# Altium PCB Load_Cell_Amplifier.PcbDoc
Units mil, origin at the board's own origin, x right, y up, seen from the top; angles counter-clockwise.
Board outline 2585 x 1355 mil, 2 copper layers (Top Layer, Bottom Layer); 30 components, 26 nets, 142 pads, 30 vias.
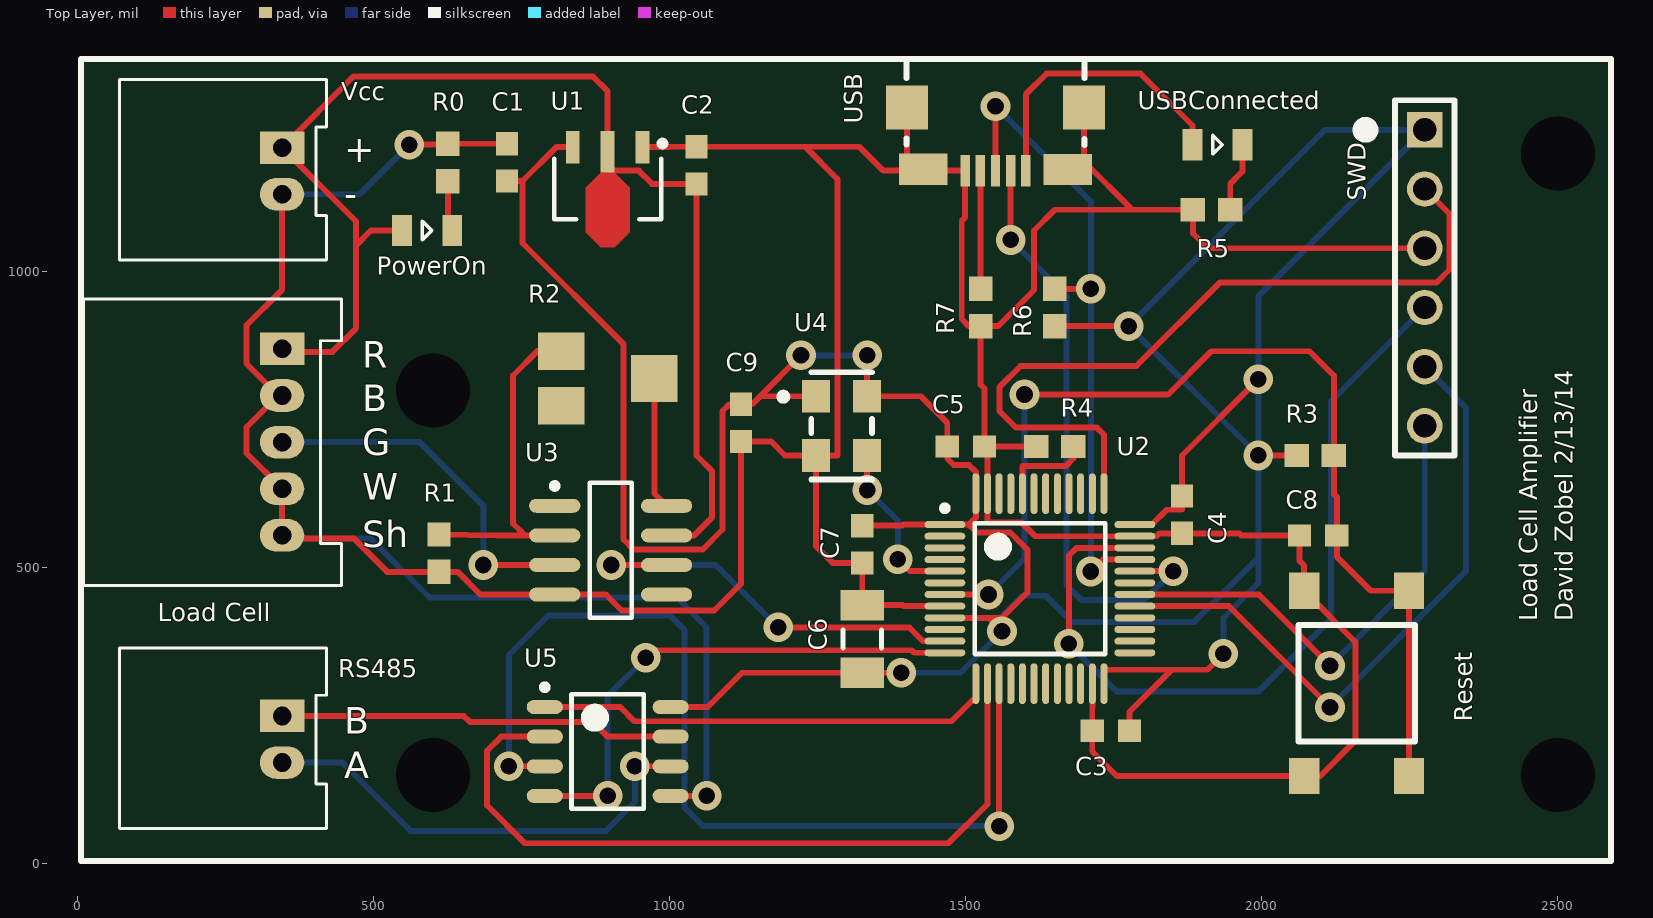
[diagram p0: Top Layer view]
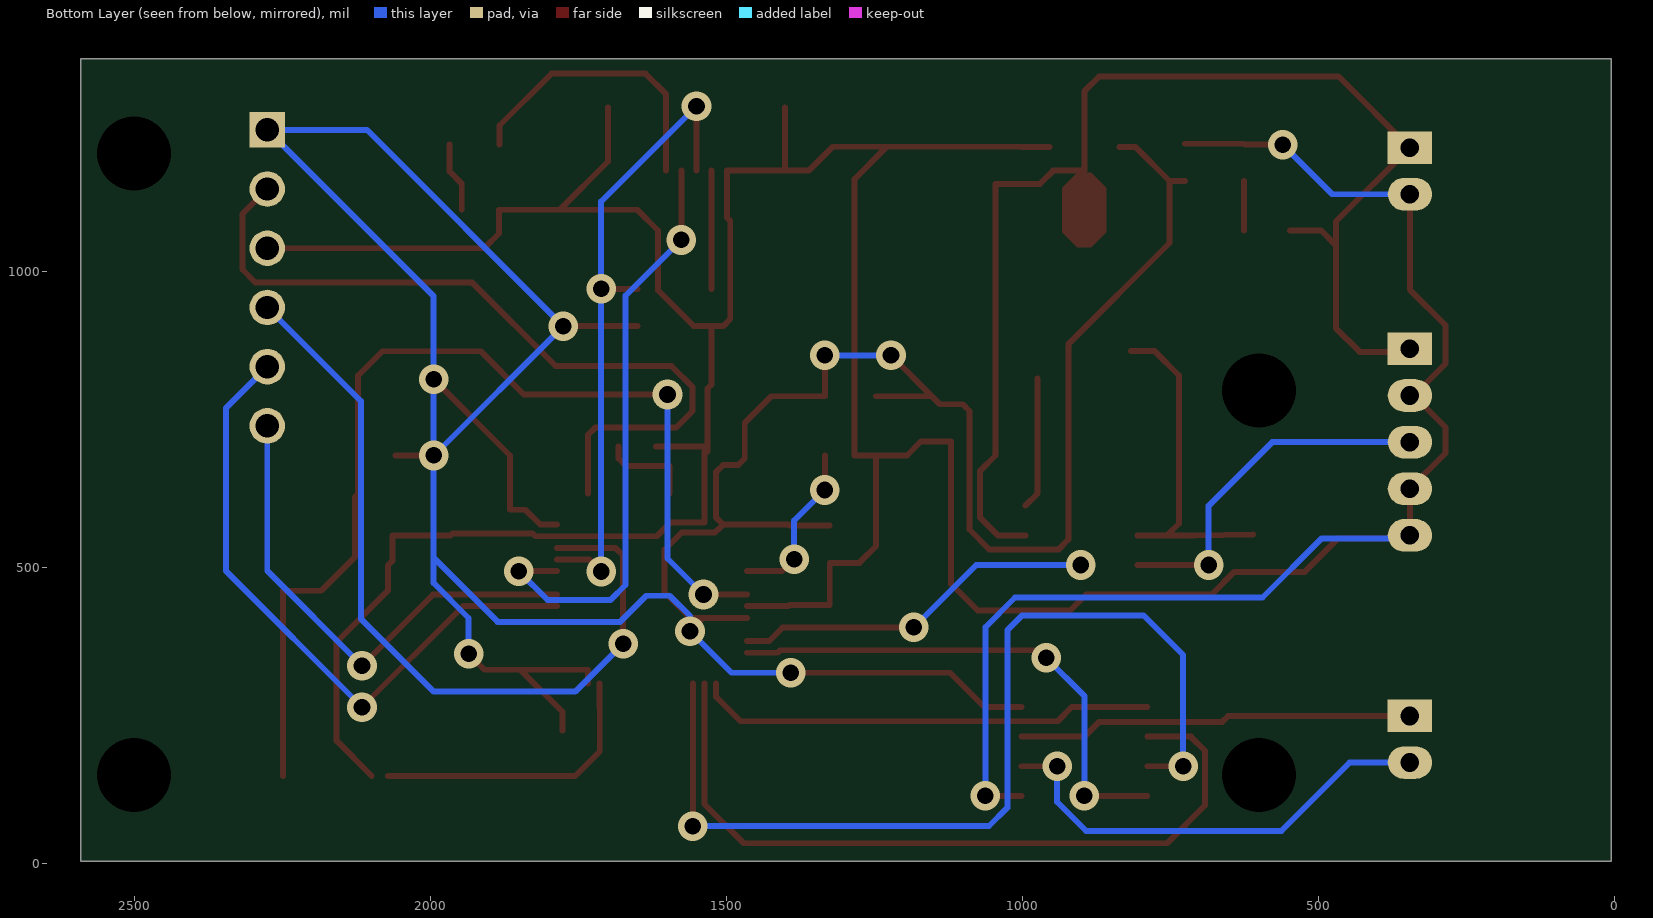
[diagram p1: Bottom Layer view, seen from below]

## Layer stack, top to bottom
Top Layer: signal copper 1.4
Dielectric: dielectric 12.6, FR-4, Dk 4.8
Bottom Layer: signal copper 1.4

## Board outline
5,5 5,1360 2590,1360 2590,5

## Design rules (kind name [scope] priority, off if disabled: settings)
Clearance [All] p1: gap=7
DiffPairsRouting [All] p1: maxlimit=10 minlimit=10 mostfreqgap=10 maxuncoupledlength=500
PolygonConnect [All] p1: connectstyle=Relief reliefconductorwidth=10 reliefentries=4 polygonreliefangle="90 Angle" airgapwidth=10
RoutingVias [All] p1: holewidth=28 width=50 viastyle="Through Hole" minholewidth=28 minwidth=50 maxholewidth=28 maxwidth=50
SolderMaskExpansion [All] p1: expansion=4
Width [All] p1: maxlimit=10 minlimit=10 preferedwidth=10
27 further rules are at their usual default settings.

## Classes and differential pairs
differential pair USB: +USB_P -USB_N

## Components (designator, comment, footprint, x,y, rotation, side; value= is the part's Value field where it differs from the comment)
C1 "Cap" CAPC0603 725,1185 r90 top
C2 "Cap" CAPC0603 1045,1180 r90 top
C3 "Cap" CAPC0603 1745,225 r180 top
C4 "Cap" CAPC0603 1865,590 r270 top
C5 "Cap" CAPC0603 1500,705 r0 top
C6 "Cap" CAPC1206 1325,380 r270 top
C7 "Cap" CAPC0603 1325,540 r270 top
C8 "Cap" CAPC0603 2095,555 r180 top
C9 "Cap" CAPC0603 1120,745 r270 top
"Load Cell" "MOLEX-HDR-1x5-SHERLOCK_RA" "MOLEX-HDR-1X5-SHERLOCK- RA" 345,870 r90 top
PowerOn "LED" LED0805 590,1070 r0 top
R0 "Res" RES0603 625,1185 r270 top
R1 "Res" RES0603 610,525 r90 top
R2 "Pot" ST4ETA103 895,820 r270 top
R3 "Res" RES0603 2090,690 r0 top
R4 "Res" RES0603 1650,705 r180 top
R5 "Res" RES0603 1915,1105 r0 top
R6 "Res" RES0603 1650,940 r90 top
R7 "Res" RES0603 1525,940 r270 top
Reset "Button" PTS645xxxxSMTR92 2160,305 r90 top (schematic designator S1)
RS485 "2-pin Horz Sherlock" MOLEX-HDR-1X2-SHERLOCK-HORZ 345,250 r90 top
SWD "SWD" SWD_STM32 2275,1240 r0 top
U1 "MCP1703AT" MCP1703AT-xx02EMB 895,1140 r270 top
U2 "STM32F072CB" STM32F072CB 1625,465 r0 top
U3 "INA145" INA145 900,530 r0 top
U4 "636L3C008M" 636L3C 1290,740 r270 top
U5 "SP3485" SP3485 895,190 r0 top
USB "USB Micro" 10118192-0001LF 1550,1150 r180 top
USBConnected "LED" LED0805 1925,1215 r0 top
Vcc "2-pin Horz Sherlock" MOLEX-HDR-1X2-SHERLOCK-HORZ 345,1210 r90 top

## Footprints (in the part's own frame and the unit in brackets; to place one, negate y for a bottom-side part, rotate by r counter-clockwise, add the part's x,y. Pads: shape width x height; smd on the part's side, far side on the other; paste and mask are expansions set on the pad)
636L3C [mm]
  rect 1.4x1.2 smd: 1(-1.27,-1.1) 2(1.27,-1.1) 3(1.27,1.1) 4(-1.27,1.1)
  silkscreen extent -2.3,-2.65 2.3,1.3, body extent -2.5,-1.6 2.5,1.6, height 2
10118192-0001LF [mm] "USB Micro-B Recepticle"
  rect 0.4x1.35 smd: 1(-1.3,-0.533) 2(-0.65,-0.533) 3(0,-0.533) 4(0.65,-0.533) 5(1.3,-0.533)
  rect 1.8x1.9 smd: SHD(-3.8,-3.248) SHD(3.8,-3.248)
  rect 2.1x1.35 smd: SHD(-3.1,-0.584) SHD(3.1,-0.598)
  silkscreen extent -3.82,-5.33 3.82,-1.63, body extent -3.96,-5.98 3.96,-0.32, height 3.09
CAPC0603 [mm] "Chip Capacitor, 2-Leads, Body 1.60x0.80mm, IPC Medium Density"
  rect 1x0.95 smd: 1(-0.8,0) 2(0.8,0)
  body extent -0.88,-0.48 0.87,0.48, height 0.8
CAPC1206 [mm] "Chip Capacitor, 2-Leads, Body 3.20x1.60mm, IPC Medium Density"
  rect 1.3x1.85 smd: 1(-1.45,0) 2(1.45,0)
  silkscreen extent -0.4,-0.82 0.4,0.82, body extent -1.7,-0.9 1.7,0.9, height 1.8
INA145 [mm] "SOIC, 8-Leads, Body 5.30x3.90mm, Pitch 1.27mm, IPC Medium Density"
  oval 2.2x0.6 smd: 1(-2.4,1.905) 2(-2.4,0.635) 3(-2.4,-0.635) 4(-2.4,-1.905) 5(2.4,-1.905) 6(2.4,-0.635) 7(2.4,0.635) 8(2.4,1.905)
  silkscreen extent -2.52,-2.9 0.9,2.9, body extent -2,-2.9 2,2.9, height 1.75
LED0805 [mm] "Chip LED, 2-Leads, Body 2.00x1.25mm, IPC Medium Density"
  rect 0.85x1.35 smd: A(-1.075,0) C(1.075,0)
  silkscreen extent -0.2,-0.4 0.2,0.4, body extent -1,-0.63 1,0.63, height 0.75
MCP1703AT-xx02EMB [mm] "SOT89, 3-Leads, Body 4.49x2.45mm, Pitch 1.50mm, Lead Span 4.1mm, IPC Medium Density"
  rect 1.4x0.6 smd: 1(-1.8,1.5) 3(-1.8,-1.5)
  rect 1.8x0.6 smd: 2(-1.6,0)
  Top Layer region: -0.7,0.3 -0.05,0.95 1.85,0.95 2.5,0.3 2.5,-0.3 1.85,-0.95 -0.05,-0.95 -0.7,-0.3
  silkscreen extent -2.08,-2.3 1.3,2.48, body extent -1.3,-2.3 1.3,2.3, height 1.6
MOLEX-HDR-1X2-SHERLOCK-HORZ [mm]
  rect 1.397x1.905 hole 0.8: 1(0,0)
  oval 1.397x1.905 hole 0.8: 2(-2,0)
  silkscreen extent -4.83,-1.91 2.92,6.98, body extent -4.83,-1.91 2.87,8.59, height 5.54
"MOLEX-HDR-1X5-SHERLOCK- RA" [mm]
  rect 1.397x1.905 hole 0.8: 1(0,0)
  oval 1.397x1.905 hole 0.8: 2(-2,0) 3(-4,0) 4(-6,0) 5(-8,0)
  silkscreen extent -10.16,-2.55 2.15,8.51, body extent -10.16,-1.96 2.14,8.54, height 5.54
PTS645xxxxSMTR92 [mm] "PTS645 Series SMT 6 mm Tactile Switch"
  rect 1.555x1.3 smd: A(-3.975,2.25) A(3.975,2.25) B(-3.975,-2.25) B(3.975,-2.25)
  silkscreen extent -2.5,-2.5 2.5,2.5, body extent -3,-3 3,3, height 4.5
RES0603 [mm] "Chip Resistor, 2-Leads, Body 1.60x0.80mm, IPC Medium Density"
  rect 1.05x1 smd: 1(-0.8,0) 2(0.8,0)
  body extent -0.88,-0.48 0.87,0.47, height 0.8
SP3485 [mm] "SOIC, 8-Leads, Body 4.90x3.90mm, Pitch 1.27mm, IPC Medium Density"
  oval 1.55x0.6 smd: 1(-2.7,1.905) 2(-2.7,0.635) 3(-2.7,-0.635) 4(-2.7,-1.905) 5(2.7,-1.905) 6(2.7,-0.635) 7(2.7,0.635) 8(2.7,1.905)
  silkscreen extent -2.82,-2.45 1.55,2.88, body extent -1.95,-2.45 1.95,2.45, height 1.75
ST4ETA103 [mm] "TRIMMER 10K OHM 0.25W SMD"
  rect 1.6x2 smd: 1(-1.175,-2) 2(1.175,-2)
  rect 2x2 smd: 3(0,2)
  body extent -2.5,-2.3 2.5,2.3, height 2.3
STM32F072CB [mm] "TSQFP, 48-Leads, Body 7.00x7.00mm, Pitch 0.50mm, IPC Medium Density"
  oval 1.75x0.3 smd: 1(-4.075,2.75) 2(-4.075,2.25) 3(-4.075,1.75) 4(-4.075,1.25) 5(-4.075,0.75) 6(-4.075,0.25) 7(-4.075,-0.25) 8(-4.075,-0.75) 9(-4.075,-1.25) 10(-4.075,-1.75) 11(-4.075,-2.25) 12(-4.075,-2.75) 25(4.075,-2.75) 26(4.075,-2.25) 27(4.075,-1.75) 28(4.075,-1.25) 29(4.075,-0.75) 30(4.075,-0.25) 31(4.075,0.25) 32(4.075,0.75) 33(4.075,1.25) 34(4.075,1.75) 35(4.075,2.25) 36(4.075,2.75)
  oval 0.3x1.75 smd: 13(-2.75,-4.075) 14(-2.25,-4.075) 15(-1.75,-4.075) 16(-1.25,-4.075) 17(-0.75,-4.075) 18(-0.25,-4.075) 19(0.25,-4.075) 20(0.75,-4.075) 21(1.25,-4.075) 22(1.75,-4.075) 23(2.25,-4.075) 24(2.75,-4.075) 37(2.75,4.075) 38(2.25,4.075) 39(1.75,4.075) 40(1.25,4.075) 41(0.75,4.075) 42(0.25,4.075) 43(-0.25,4.075) 44(-0.75,4.075) 45(-1.25,4.075) 46(-1.75,4.075) 47(-2.25,4.075) 48(-2.75,4.075)
  silkscreen extent -4.2,-2.8 2.8,3.57, body extent -3.5,-3.5 3.5,3.5, height 1.6
SWD_STM32 [mil] "SWD connector matching the pinout on STM Discovery Boards"
  rect 60x60 hole 39.37: 1(0,0)
  round 60 hole 39.37: 2(0,-100) 3(0,-200) 4(0,-300) 5(0,-400) 6(0,-500)
  silkscreen extent -110,-550 50,50

## Part data
"Load Cell": "Header, Molex, 2mm Pitch Sherlock Header, Single Row, Vertical, 5 Circuits, Length 3.3mm, 0353620550"
R2: library part Potentiometer, "Potentiometer"
Reset: "SPST Button"
RS485 Vcc: library part MOLEX-HDR-1x2-SHERLOCK_RA, "Header, Molex, 2mm Pitch Sherlock Header, Single Row, Horizontal, 2 Circuits, Length 3.3mm,  0353630260"
SWD: library part SWD_STM32, "SWD connector matching the pinout on STM Discovery Boards"
U1: "250 mA, 16V, Low Quiescent Current LDO Regulator"
U2: "MCU 32BIT 128KB FLASH 48LQFP"
U3: "Diff Amp"
U4: library part 636L3C, "HCMOS/TTL Clock Oscillator"
U5: "IC TXRX RS485 HALF DUPLEX 8NSOIC"
USB: "USB Mini B Metal Shield SMT"

## Free pads (board coordinates)
  round 100 hole 125 unplated: 0(600,150) 0(600,800) 0(2500,150) 0(2500,1200)

## Via types
v1: diameter 50, hole 28, Top Layer to Bottom Layer, tented both sides, 30 vias

## Nets (pads, with @x,y where several pads share a name; then routed paths per layer and width w, separated by ;. In a path a pad name is that pad's centre, name@x,y a point inside that pad or via, vN(x,y) a via of type N, cw(c..) or ccw(c..) an arc to the next point about the centre after c; other vN are vias at no path point)
3V3: C1.1 C3.1 C4.1 C5.1 C6.2 C7.1 C9.1 R3.1 R6.1 SWD.1 U1.3 U2.1 U2.9 U2.24 U2.36 U2.48 U4.1 U4.4 U5.8 | length 6613.4
  Top Layer w10: C1.1 751,1153.5 ; U1.3 808.36,1210.87 751,1153.5 ; U5.8 1064,265 1121.91,322.91 C6.2 v1(1390.91,322.91) ; v1(1221.5,859) 1152.5,790 ; U4.1 1152.5,790 ; C7.1 1393,571.5 1394.77,573.27 U2.1 1505,573.27 ; v1(1333.31,859) U4.4 1423.5,790 1468.5,745 C5.1 1468.5,685 1479.5,674 1505,674 1516.73,662.27 U2.48 1516.73,585 1505,573.27 ; U2.9 1538.21,415.79 ; v1(1561,393) 1538.21,415.79 ; R6.1 v1(1775,908.5) ; U2.24 1733.27,328 1847.5,328 ; C3.1 1776.5,257 1847.5,328 ; U2.36 1814,573.27 1839,598.27 1865,598.27 C4.1 1865,690 v1(1994,819) ; v1(1935,355) 1908,328 1847.5,328 ; v1(1993.5,690) R3.1 ; 751,1153.5 751,1049 922,878 922,548 939,531 1055,531 1089,565 1089,765 1100.5,776.5 C9.1 1139,776.5 1152.5,790 ; 1505,573.27 1519,560 1575,560 1604,531 1604,458.79 1561,415.79 1538.21,415.79
  Bottom Layer w10: v1(1221.5,859) v1(1333.31,859) ; v1(1390.91,322.91) 1490.91,322.91 v1(1561,393) 1561,419 1595,453 1635,453 1679,409 1886,409 1994,517 ; v1(1935,355) 1935,415.5 1994,474.5 1994,517 ; v1(1993.5,690) v1(1775,908.5) 2106.5,1240 SWD.1 1994,959 v1(1994,819) 1994,517
/RE: U2.14 U5.2 | length 1302.5
  Top Layer w10: U5.2 715,215 691,191 691,99 755,35 1470.42,35 1536.42,101 U2.14
CLK8MHZ: U2.5 U4.3 | length 284.5
  Top Layer w10: v1(1333.31,631.69) U4.3 ; v1(1385,515) 1405.47,494.53 U2.5
  Bottom Layer w10: v1(1333.31,631.69) 1385,580 v1(1385,515)
DE: U2.15 U5.3 | length 1668.3
  Top Layer w10: v1(728,165) U5.3 ; v1(1556.1,64) U2.15
  Bottom Layer w10: v1(728,165) 728,353 795,420 1000,420 1025,395 1025,95 1056,64 v1(1556.1,64)
GND: "Load Cell.2" "Load Cell.4" "Load Cell.5" C1.2 C2.2 C3.2 C4.2 C5.2 C6.1 C7.2 C8.2 C9.2 R0.1 R1.1 R4.2 R5.1 R7.2 Reset.A SWD.3 U1.1 U2.8 U2.23 U2.35 U2.47 U3.4 U4.2 U5.5 USB.5 USB.SHD Vcc.2 | length 8502.5
  Top Layer w10: 330,785.32 332.8,785.32 ; 345,550.04 466,550.04 522.54,493.5 R1.1 641.5,493.5 680,455 U3.4 892,455 919,428 1075,428 1120,473 C9.2 1171,713.5 1194.5,690 U4.2 ; 345,555.04 345,633.78 285,693.78 285,737.52 332.8,785.32 ; Vcc.2 345,970 285,910 285,845 338.74,791.26 332.8,785.32 ; 370.32,785.32 332.8,785.32 ; v1(560,1215) R0.1@623.5,1215 ; R0.1 C1.2 ; U1.1 999,1210.87 999.63,1211.5 C2.2 1228.5,1211.5 ; U5.5 v1(1062,115) ; USB.SHD@1400.39,1171.39 USB.SHD@1400.39,1277.89 ; U2.8 1394.61,435.47 1393,437.09 C6.1 C7.2 1275,508.5 1246.69,536.81 U4.2 ; R4.2 C5.2 ; USB.SHD@1699.61,1277.89 1699.61,1186.39 1781,1105 ; U2.23 1713.58,264.08 1713.5,264 C3.2 1713.5,190 1755,148.5 Reset.A@2071.42,148.5 ; 2098.5,148.5 2157.91,207.91 2157.91,375 2071.42,461.5 2071.42,504 2063.5,511.91 C8.2 1965.5,555 1962,558.5 C4.2 1826.92,558.5 1822,553.58 U2.35 1617,553.58 1593.58,577 1536.42,577 U2.47 1536.42,696.49 1531.5,696.49 C5.2 ; SWD.3 1908.5,1040 1883.5,1065 R5.1 1781,1105 ; 1228.5,1211.5 1283,1157 1283,690 U4.2 ; 1228.5,1211.5 1320,1211.5 1360.5,1171 USB.5 1498.82,1092 1493,1086.18 1493,920.5 1505,908.5 R7.2 ; R7.2 1525,909 1555,909 1615,969 1615,1070 1650,1105 1781,1105 ; R7.2 1525,809.5 1531.5,803 C5.2
  Bottom Layer w10: Vcc.2 476.26,1131.26 v1(560,1215) ; 380,550.04 494,550.04 594.04,450 1012,450 1062,400 v1(1062,115)
JCK/SWCLK: SWD.2 U2.37 | length 1329.1
  Top Layer w10: U2.37 1733.27,725 1721.27,737 1584.54,737 1556.54,765 1556.54,805 1592.54,841 1788,841 1929,982 2295,982 2317,1004 2317,1098 SWD.2
JNTRST: SWD.5 U2.29 | length 1099.4
  Top Layer w10: U2.29 1944.53,435.47 v1(2115,265)
  Bottom Layer w10: v1(2115,265) 2345,495 2345,770 SWD.5
JTDO: SWD.6 U2.30 | length 850.6
  Top Layer w10: U2.30 1994.84,455.16 v1(2115,335)
  Bottom Layer w10: v1(2115,335) 2275,495 SWD.6
JTMS/SWDIO: SWD.4 U2.34 | length 1384.7
  Top Layer w10: v1(1674,372) 1674,520.9 1687,533.9 U2.34
  Bottom Layer w10: v1(1674,372) 1755,291 1994,291 2117,414 2117,782 SWD.4
NetPowerOn_C: PowerOn.C R0.2 | length 83.5
  Top Layer w10: PowerOn.C@625,1070 R0.2
NetR1_2: R1.2 R2.1 U3.2 | length 572.2
  Top Layer w10: R1.2 708.5,555 755,555 ; U3.2 755,555 ; R2.1 776.26,866.26 735,825 735,575 755,555
NetR2_3: R2.3 U3.8 | length 223.6
  Top Layer w10: R2.3 973.74,625.75 U3.8
NetR4_1: R4.1 U2.44 | length 158
  Top Layer w10: U2.44 1595.47,672 1668.5,672 1681.5,685 R4.1
NetR5_2: R5.2 USBConnected.C | length 118.6
  Top Layer w10: R5.2 1946.5,1149 1967.32,1169.83 USBConnected.C
NetR7_1: R7.1 USB.4 | length 199.7
  Top Layer w10: USB.4 1525,1170.41 R7.1
NetRS485_1: RS485.1 U5.7 | length 670.8
  Top Layer w10: RS485.1 652,250 662,240 870,240 895,215 U5.7
NetRS485_2: RS485.2 U5.6 | length 784.3
  Top Layer w10: v1(941,165) U5.6
  Bottom Layer w10: RS485.2 446.74,171.26 562,56 892,56 941,105 v1(941,165)
NetUSB_1: USB.1 USBConnected.A | length 493.6
  Top Layer w10: USB.1 1601.18,1300 1636.18,1335 1795,1335 1882.68,1247.32 USBConnected.A
NRST: C8.1 R3.2 Reset.B U2.7 | length 1773.3
  Top Layer w10: U2.7 v1(1538.16,455.16) ; v1(1599,793) 1841.56,793 1914.56,866 2080.5,866 2121.5,825 R3.2 2121.5,625 2126.5,620 C8.1 2126.5,519 2184,461.5 2248.58,461.5 Reset.B@2248.58,148.5
  Bottom Layer w10: v1(1538.16,455.16) 1599,516 v1(1599,793)
USARTRX: U2.13 U5.1 | length 777.5
  Top Layer w10: U5.1 916,265 940,241 1475.73,241 1516.73,282 U2.13
USARTTX: U2.12 U5.4 | length 878.5
  Top Layer w10: U5.4 v1(895,115) ; v1(959,348) 971.97,360.97 1408.76,360.97 1413,356.73 U2.12
  Bottom Layer w10: v1(895,115) 895,284 v1(959,348)
USB_N: U2.32 USB.2 | length 1014
  Top Layer w10: USB.2 1575.59,1054.41 v1(1576,1054) ; U2.32 v1(1850,494.53)
  Bottom Layer w10: v1(1576,1054) 1670,960 1670,471.1 1695,446.1 1801.58,446.1 v1(1850,494.53)
USB_P: R6.2 U2.33 USB.3 | length 1105.5
  Top Layer w10: USB.3 v1(1550,1280) ; R6.2 v1(1711,971.5) ; v1(1711,494) 1731.21,514.21 U2.33
  Bottom Layer w10: v1(1550,1280) 1711,1119 v1(1711,971.5) v1(1711,494)
VCC: "Load Cell.1" C2.1 PowerOn.A U1.2 U3.7 Vcc.1 | length 2117.5
  Top Layer w10: 380,865 430,865 470,905 470,1045 ; PowerOn.A 495,1070 470,1045 ; U3.7 1041,555 1071,585 1071,664 1045,690 C2.1 970,1148.5 947.5,1171 895,1171 U1.2 895,1305 870,1330 465.3,1330 345.3,1210 470,1085.3 470,1045
VIN: "Load Cell.3" U3.3 | length 605
  Top Layer w10: v1(685,505) U3.3
  Bottom Layer w10: 345,712.52 577.48,712.52 685,605 v1(685,505)
VOUT: U2.11 U3.6 | length 710.3
  Top Layer w10: v1(901,505) U3.6 ; v1(1183,399.49) 1404.51,399.49 1427.58,376.42 U2.11
  Bottom Layer w10: v1(901,505) 1077.49,505 v1(1183,399.49)
pads on no net: R2.2 U2.2 U2.3 U2.4 U2.6 U2.10 U2.16 U2.17 U2.18 U2.19 U2.20 U2.21 U2.22 U2.25 U2.26 U2.27 U2.28 U2.31 U2.38 U2.39 U2.40 U2.41 U2.42 U2.43 U2.45 U2.46 U3.1 U3.5

## Silkscreen, mask and mechanical layers (free items; w line width, h text height)
Top Overlay:
  the board outline again, w10
  text "+" at 450,1185 h45
  text "-" at 450,1110 h45
  text "R" at 480,838.5 h45
  text "B" at 480,765 h45
  text "G" at 480,690 h45
  text "W" at 480,615 h45
  text "Sh" at 480,535 h45
  text "Load Cell Amplifier" at 2465,410 h30 r90
  text "David Zobel 2/13/14" at 2525,410 h30 r90
  text "B" at 450,220 h45
  text "A" at 450,145 h45